# Altium PCB STM8S003F3P6_RF433_RELAY_220V_LEARN_CODE.PcbDoc
Units mil, origin at the board's own origin, x right, y up, seen from the top; angles counter-clockwise.
Board outline 2659.87 x 1309.87 mil, 2 copper layers (Top Layer, Bottom Layer); 32 components, 30 nets, 115 pads, 0 vias.
Unrouted connection lines stored in the file: 54.
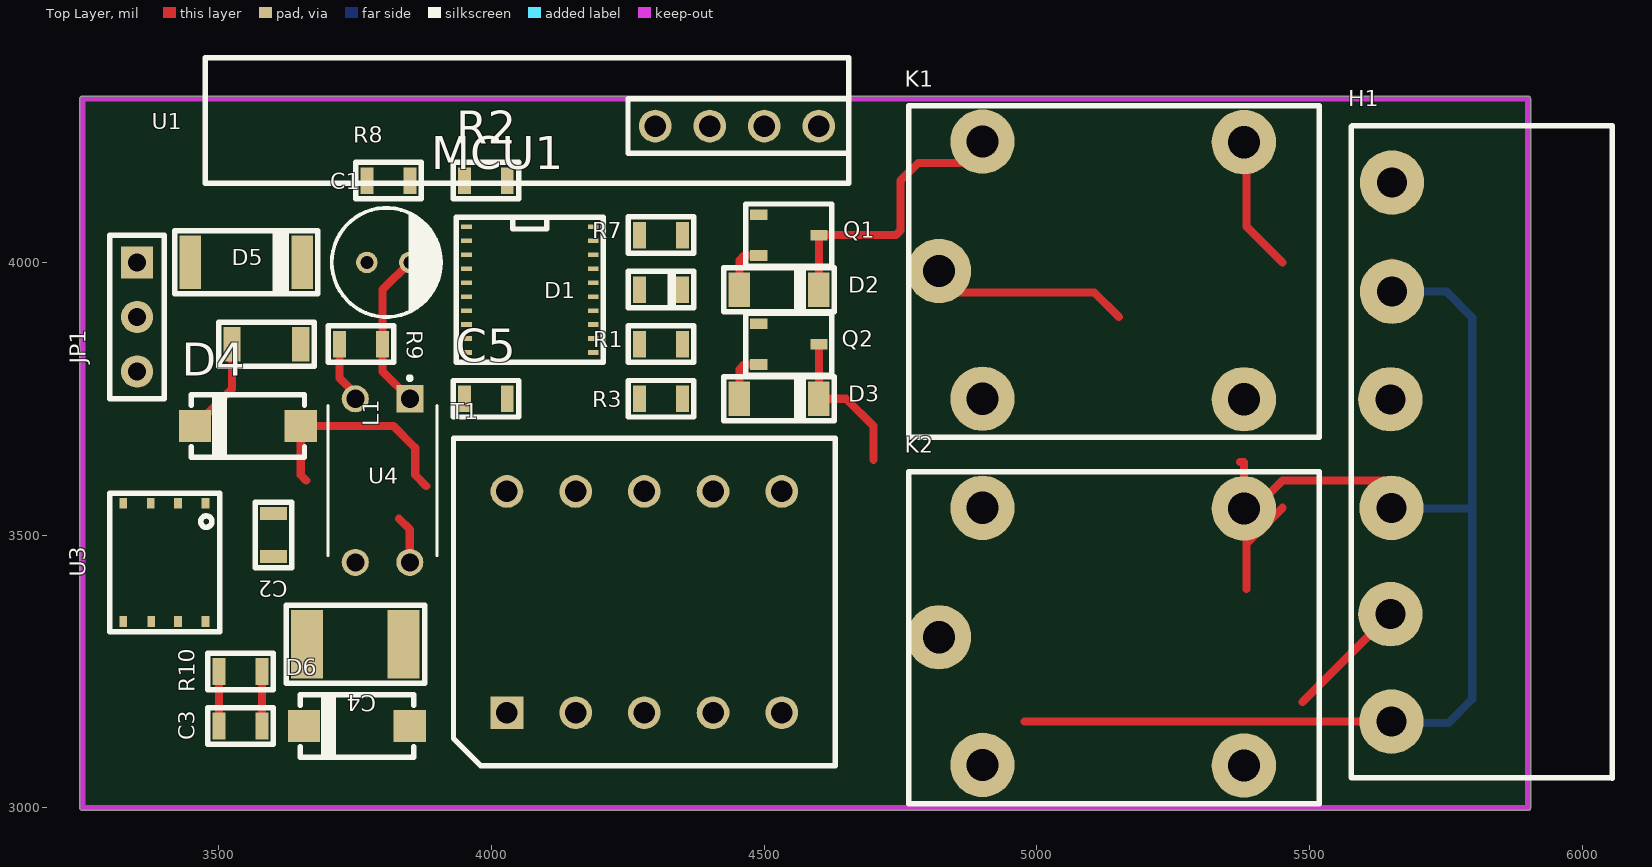
[diagram p0: Top Layer view]
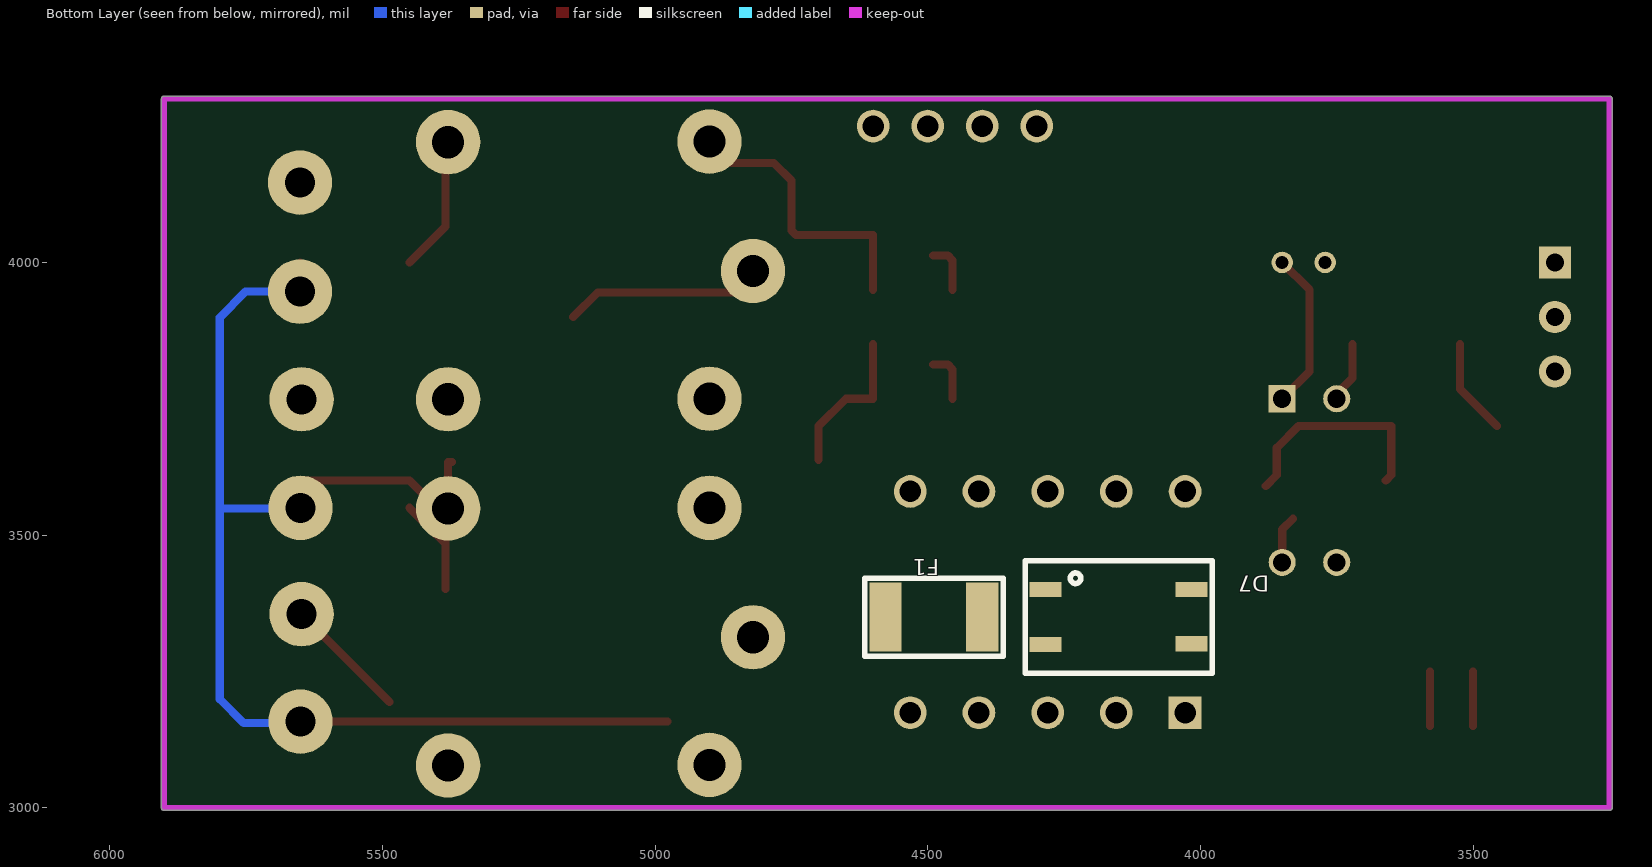
[diagram p1: Bottom Layer view, seen from below]

## Layer stack, top to bottom
Top Solder: solder mask 0.4, Solder Resist, Dk 3.5
Top Layer: signal copper 1.4
Dielectric 1: dielectric 12.6, FR-4, Dk 4.8
Bottom Layer: signal copper 1.4
Bottom Solder: solder mask 0.4, Solder Resist, Dk 3.5

## Board outline
3245.06,3000 ccw(c3250,3000) 3250,2995.06 5900,2995.06 ccw(c5900,3000) 5904.94,3000 5904.94,4300 ccw(c5900,4300) 5900,4304.94 3250,4304.94 ccw(c3250,4300) 3245.06,4300

## Design rules (kind name [scope] priority, off if disabled: settings)
Clearance [All] p1: gap=10 ignorepadtopadclearanceinfootprint=FALSE except(0: Arc-Hole Track-Hole SMDPad-Hole THPad-Hole Via-Hole Fill-Hole Poly-Hole Region-Hole Text-Hole)
PolygonConnect [All] p1: connectstyle=Relief reliefconductorwidth=10 reliefentries=4 polygonreliefangle="90 Angle" airgapwidth=10
RoutingVias [All] p1: holewidth=28 width=50 viastyle="Through Hole" minholewidth=28 minwidth=50 maxholewidth=28 maxwidth=50
SolderMaskExpansion [All] p1: expansion=4 istentingtop=FALSE
Width [All] p1: maxlimit=50 minlimit=10 preferedwidth=25
30 further rules are at their usual default settings.

## Classes and differential pairs
component class STM8S003F3P6_RF433_RELAY_220V_LEARN_CODE: C1 C3 C4 C5 D1 D2 D3 D4 D5 D6 D7 F1 H1 JP1 K1 K2 L1 MCU1 Q1 Q2 R1 R2 R3 R7 R8 R9 R10 U1 U3 U4

## Components (designator, comment, footprint, x,y, rotation, side; value= is the part's Value field where it differs from the comment)
C1 "1000uF" CAP_RAD_4mm 3810.63,4000 r0 top
C2 "104" C0805 3600,3500 r90 top
C3 "400V-472M" C0805 3539.36,3149.99 r0 top
C4 "0.01uF 1KV" C1812 3750,3300 r0 top
C5 "104" C0805 3989.38,3750.01 r180 top
D1 "LED0805" L0805RED 4310.63,3925.4 r0 top
D2 "1N4148" SOD-80 4527.17,3950 r0 top
D3 "1N4148" SOD-80 4527.17,3750 r0 top
D4 "SB540" DO-214AC(SMA) 3475.59,3700 r0 top
D5 "1N5229B" DO-213AB 3550,4000 r0 top
D6 "US1A" DO-214AC(SMA) 3675.59,3150 r0 top
D7 "MB2S" TO-269AA 4150,3350 r180 bottom
F1 "1A" FUSE1812 4488.58,3350 r180 bottom
H1 "Header Big 6" "HEADER BIG 6" 5816.31,3656.26 r270 top
JP1 "Header 3x1 TH Pitch 2.54mm" "Header 3x1 TH Pitch 2.54mm" 3350,3900 r270 top
K1 "Relay-SPDT" "RELAY 5A" 5145.08,3989.17 r0 top
K2 "Relay-SPDT" "RELAY 5A" 5145.08,3317.72 r0 top
L1 "10uH" INDUCTOR_1206 3587.01,3750 r0 top
MCU1 "STM8S003F3P6" TSSOP20_0.65_4.4 4070,3950 r0 top
Q1 "2N3904" SOT23-3 4544.88,4050 r270 top
Q2 "2N3904" SOT23-3 4544.88,3850 r270 top
R1 "10k" R0805 4350,3850 r0 top
R2 "10k" R0805 4028.74,4150 r0 top
R3 "10k" R0805 4350,3750 r0 top
R7 "10k" R0805 4350,4050 r0 top
R8 "1K" R0805 3771.26,4150 r180 top
R9 "68" R0805 3800,3850 r0 top
R10 "150K" R0805 3578.74,3250 r0 top
T1 "TRANSFORMER_EE16A" TRANSFORMER_EE16A 4280,3377.24 r90 top
U1 "RF433_315_RECEVICE" RF433_315_RECEVICE 4100,4250 r0 top
U3 "TNY253" SOIC08_1.27_6.0 3400,3450 r270 top
U4 "PC817" DIP4 3800,3600 r270 top

## Footprints (in the part's own frame and the unit in brackets; to place one, negate y for a bottom-side part, rotate by r counter-clockwise, add the part's x,y. Pads: shape width x height; smd on the part's side, far side on the other; paste and mask are expansions set on the pad)
C0805 [mm]
  rect 0.6x1.24 smd: 1(-1,0) 2(1,0)
  silkscreen extent -1.52,-0.85 1.53,0.85, body extent -1,-0.6 1,0.6, height 1
C1812 [mm]
  rect 1.5x3.2 smd: 1(-2.25,0) 2(2.25,0)
  silkscreen extent -3.22,-1.82 3.23,1.81, body extent -2.25,-1.6 2.25,1.6, height 0.97
CAP_RAD_4mm [mm]
  round 1 hole 0.6: 1(-1,0) 2(1,0)
  silkscreen extent -2.63,-2.54 2.51,2.54, body extent -2.53,-2.53 2.52,2.53, height 7.29
DIP4 [mm]
  rect 1.26x1.26 hole 0.84: 1(-3.81,1.27)
  round 1.26 hole 0.84: 2(-3.81,-1.27) 3(3.81,-1.27) 4(3.81,1.27)
  silkscreen extent -4.86,-2.54 3.5,2.54, body extent -3.94,-2.29 3.94,2.3, height 4.3
DO-213AB [mm]
  rect 1x2.5 smd: 1(-2.6,0) 2(2.6,0)
  silkscreen extent -3.32,-1.48 3.32,1.48, body extent -2.6,-1.3 2.6,1.3, height 2.64
DO-214AC(SMA) [mm]
  rect 1.5x1.5 smd: 1(4.43,0) 2(-0.5,0)
  silkscreen extent -0.67,-1.5 4.61,1.5, body extent -0.67,-1.46 4.61,1.46, height 2.41
FUSE1812 [mm]
  rect 1.5x3.2 smd: 1(-2.25,0) 2(2.25,0)
  silkscreen extent -3.22,-1.82 3.23,1.81, body extent -2.37,-1.74 2.37,1.74, height 1.03
"Header 3x1 TH Pitch 2.54mm" [mm]
  rect 1.5x1.5 hole 0.85: 1(-2.54,0)
  round 1.5 hole 0.85: 2(0,0) 3(2.54,0)
  silkscreen extent -3.81,-1.27 3.81,1.27, body extent -3.81,-1.27 3.81,1.27, height 8.89
"HEADER BIG 6" [mm]
  round 3 hole 1.4: 1(-12.45,-4.2) 2(-7.37,-4.2) 3(-2.356,-4.275) 4(2.699,-4.224) 5(7.652,-4.275) 6(12.656,-4.224)
  silkscreen extent -15.1,-6.1 15.28,6.05, body extent -14.87,-5.95 15.13,6.05, height 3.15
INDUCTOR_1206 [mm]
  rect 0.8x1.6 smd: 1(-1.6,2.54) 2(1.6,2.54)
  silkscreen extent -2.23,1.52 2.22,3.56, body extent -1.6,1.74 1.6,3.34, height 1.1
L0805RED [mm]
  rect 0.6x1.24 smd: 1(-1,0.625) 2(1,0.625)
  silkscreen extent -1.53,-0.23 1.52,1.47, body extent -1,0 1,1.25, height 1.1
R0805 [mm]
  rect 0.6x1.24 smd: 1(-2,0) 2(0,0)
  silkscreen extent -2.52,-0.85 0.53,0.85, body extent -2,-0.62 0,0.62, height 0.45
"RELAY 5A" [mm]
  round 3 hole 1.5: 1(-6.225,5.9) 2(-8.25,-0.125) 3(-6.225,-6.075) 4(5.95,-6.1) 5(5.95,5.875)
  silkscreen extent -9.65,-7.88 9.45,7.57, body extent -9.65,-7.88 9.45,7.62, height 15.3
RF433_315_RECEVICE [mil]
  round 60 hole 39.37: 1(200,0) 2(300,0) 3(400,0) 4(500,0)
  silkscreen extent -625,-105 555,125, body extent -626,-105 555,167, height 472
SOD-80 [mm]
  rect 1x1.6 smd: 1(-1.85,0) 2(1.85,0)
  silkscreen extent -2.58,-1.02 2.58,1.02, body extent -1.82,-0.8 1.88,0.8, height 1.6
SOIC08_1.27_6.0 [mm]
  rect 0.5x0.36 smd: 1(-2.75,1.913) 2(-2.75,0.637) 3(-2.75,-0.637) 4(-2.75,-1.913) 5(2.75,-1.913) 6(2.75,-0.613) 7(2.75,0.637) 8(2.75,1.913)
  silkscreen extent -3.22,-2.55 3.22,2.58, body extent -3,-2.45 3,2.45, height 1.75
SOT23-3 [mm]
  rect 0.5x0.8 smd: 1(-0.95,-1.4) 2(0.95,-1.4) 3(0,1.4)
  silkscreen extent -1.45,-2 1.45,2, body extent -1.45,-1.4 1.45,1.4, height 1.3
TO-269AA [mm]
  rect 1.5x0.7 smd: 1(-3.4,1.275) 2(-3.4,-1.275) 3(3.4,-1.25) 4(3.4,1.275)
  silkscreen extent -4.34,-2.62 4.37,2.62, body extent -3.52,-2.47 3.52,2.47, height 2.7
TRANSFORMER_EE16A [mm]
  rect 1.524x1.524 hole 1: 1(-5.15,6.4)
  round 1.524 hole 1: 2(-5.15,3.2) 3(-5.15,0) 4(-5.15,-3.2) 5(-5.15,-6.4) 6(5.15,-6.4) 7(5.15,-3.2) 8(5.15,0) 9(5.15,3.2) 10(5.15,6.4)
  silkscreen extent -7.62,-8.89 7.62,8.89
TSSOP20_0.65_4.4 [mm]
  rect 0.5x0.22 smd: 1(-2.95,2.925) 2(-2.95,2.275) 3(-2.95,1.625) 4(-2.95,0.975) 5(-2.95,0.325) 6(-2.95,-0.325) 7(-2.95,-0.975) 8(-2.95,-1.625) 9(-2.95,-2.275) 10(-2.95,-2.925) 11(2.95,-2.925) 12(2.95,-2.275) 13(2.95,-1.625) 14(2.95,-0.975) 15(2.95,-0.325) 16(2.95,0.325) 17(2.95,0.975) 18(2.95,1.625) 19(2.95,2.275) 20(2.95,2.925)
  silkscreen extent -3.42,-3.38 3.42,3.38, body extent -3.14,-3.25 3.14,3.25, height 1.09

## Part data
C1: library part Capacitor(Radian)
C2 C3 C5: library part C0805
C4: library part Capacitors(SMD)
D2 D3: library part "1N4148 (SOD-80)"
D4: library part "Diode Schottky"
D5: library part "Diode Zener"
D6: library part US1A-US1M
D7: library part "Diode MB2S"
F1: library part Fuse
L1: library part Inductor
Q1 Q2: library part "2N3904 (SOT-23)"
R1 R2 R3 R7 R8 R9 R10: library part "Resistor SMD"
U1: library part RF433_315
K1 K2: LatestRevisionDate=17-Jul-2002, LatestRevisionNote="Re-released for DXP Platform.", PackageReference=MODULE5B, Published=24-Mar-1999, Publisher="Altium Limited"

## Nets (pads, with @x,y where several pads share a name; then routed paths per layer and width w, separated by ;. In a path a pad name is that pad's centre, name@x,y a point inside that pad or via, vN(x,y) a via of type N, cw(c..) or ccw(c..) an arc to the next point about the centre after c; other vN are vias at no path point)
GND: C1.1 D1.2 D2.1 D3.1 D5.1 JP1.1 Q1.2 Q2.2 T1.7 U1.4 | length 185.8
  Top Layer w15: D3.1 4454.33,3803.81 4463.12,3812.6 Q2.2 ; D2.1 4454.33,4003.81 4463.12,4012.6 Q1.2
NetC1_2: C1.2 D4.2 L1.1 R9.2 U4.1 | length 469.6
  Top Layer w15: D4.2 3524.02,3768.11 L1.1 ; U4.1 3800,3800 R9.2 3800,3950 C1.2
NetC2_1: C2.1 C4.1 D7.4 U3.2 U3.3 U3.6 U3.7 U3.8 U4.3
NetC2_2: C2.2 U3.1
NetC3_1: C3.1 D6.2 R10.1 | length 100
  Top Layer w15: C3.1 R10.1
NetC3_2: C3.2 C4.2 D7.3 R10.2 T1.3 | length 100
  Top Layer w15: C3.2 3578.74,3200 R10.2
NetC5_1: C5.1 MCU1.7
NetC5_2: C5.2 MCU1.8
NetD1_1: D1.1 R1.2
NetD2_2: D2.2 K1.1 Q1.3 | length 513.1
  Top Layer w15: D2.2 Q1.3 4741.21,4050 4750,4058.79 4750,4150 4782.28,4182.28 K1.1@4904.92,4182.28
NetD3_2: D3.2 K2.1 Q2.3 | length 282.5
  Top Layer w15: Q2.3 D3.2 4650,3750 4700,3700 4700,3638.19
NetD4_1: D4.1 T1.6 | length 409
  Top Layer w15: 3660,3600 3650,3610 D4.1 3820,3700 3860,3660 3860,3610 3880,3590
NetD5_2: D5.2 R9.1 U4.2 | length 111.9
  Top Layer w15: R9.1 3721.26,3788.1 3750,3759.36 U4.2
NetD6_1: D6.1 T1.5 U3.5
NetD7_1: D7.1 H1.2 H1.4 H1.6 | length 1855.4
  Top Layer w15: 4977,3158 H1.6
  Bottom Layer w15: H1.6 5652.79,3155.21 5754.21,3155.21 5798,3199 5798,3549 ; H1.4 5651,3549 5798,3549 ; H1.2 5750.58,3946.42 5798,3899 5798,3549
NetD7_2: D7.2 F1.2
NetF1_1: F1.1 H1.5 K1.2 K2.2 | length 578
  Top Layer w15: K1.2@4825.2,3945.08 5104.92,3945.08 5150,3900 ; 5487.08,3194.08 H1.5
  Bottom Layer w15: K2.2 K2.2@4825.2,3317.72
NetH1_1: H1.1 K1.5 | length 212.2
  Top Layer w15: K1.5@5384.25,4181.3 5384.25,4065.75 5450,4000 ; 5650.38,4000 5652.96,3997.42
NetH1_3: H1.3 K2.5 | length 618.1
  Top Layer w15: 5372.28,3634.23 ccw(c5384.25,3709.84) 5379.33,3633.45 K2.5 ; 5384.25,3401.3 5384.25,3429.02 5384.25,3484.25 ; K2.5@5414.17,3564.17 5450,3600 5650,3600 ; 5450,3550 5414.17,3514.17 5384.25,3484.25 ; 5384.25,3484.25 5384.25,3534.25 5384.25,3484.25
NetJP1_2: JP1.2 R8.2
NetMCU1_4: MCU1.4 R2.1
NetMCU1_11: MCU1.11 R1.1
NetMCU1_13: MCU1.13 U1.2 U1.3
NetMCU1_15: MCU1.15 R8.1
NetMCU1_16: MCU1.16 R3.1
NetMCU1_17: MCU1.17 R7.1
NetQ1_1: Q1.1 R3.2
NetQ2_1: Q2.1 R7.2
NetU3_4: U3.4 U4.4 | length 88.3
  Top Layer w15: 3830,3530 3850,3510 U4.4
VCC: JP1.3 K1.3 K2.3 L1.2 MCU1.9 R2.2 U1.1
pads on no net: K1.4 K2.4 MCU1.1 MCU1.2 MCU1.3 MCU1.5 MCU1.6 MCU1.10 MCU1.12 MCU1.14 MCU1.18 MCU1.19 MCU1.20 T1.1 T1.2 T1.4 T1.8 T1.9 T1.10

## Keep-outs
Keep-Out Layer:
  lines w9.84: 3250,3000 3250,4300 5900,4300 5900,3000 3250,3000